# EAGLE board Son Robot Kart (EAGLE 9.6.2)
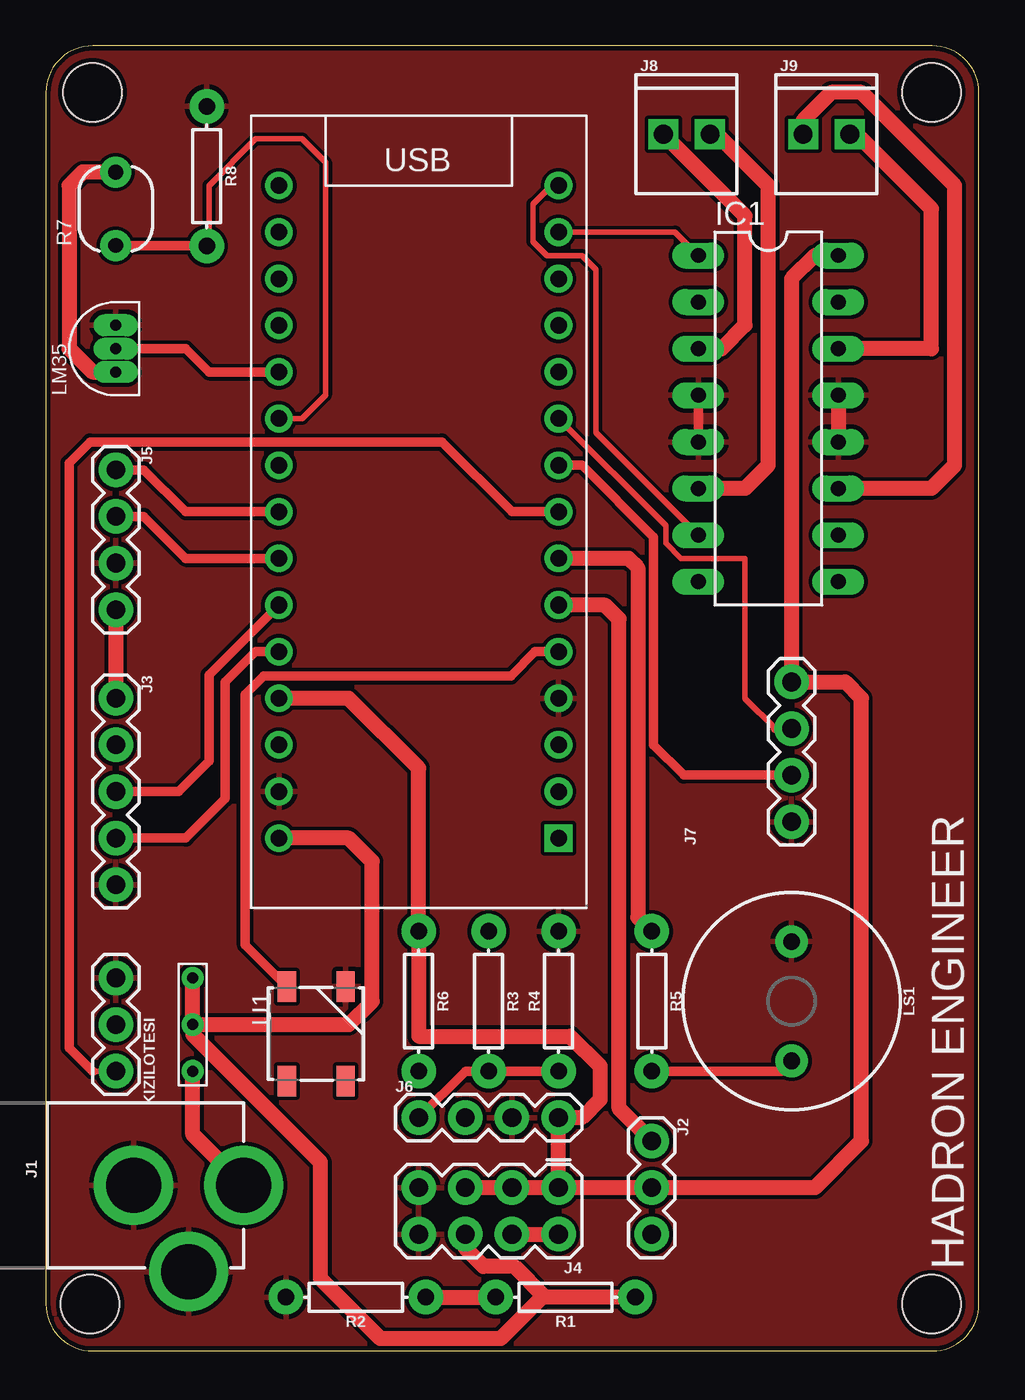
[diagram p0: board, top side]
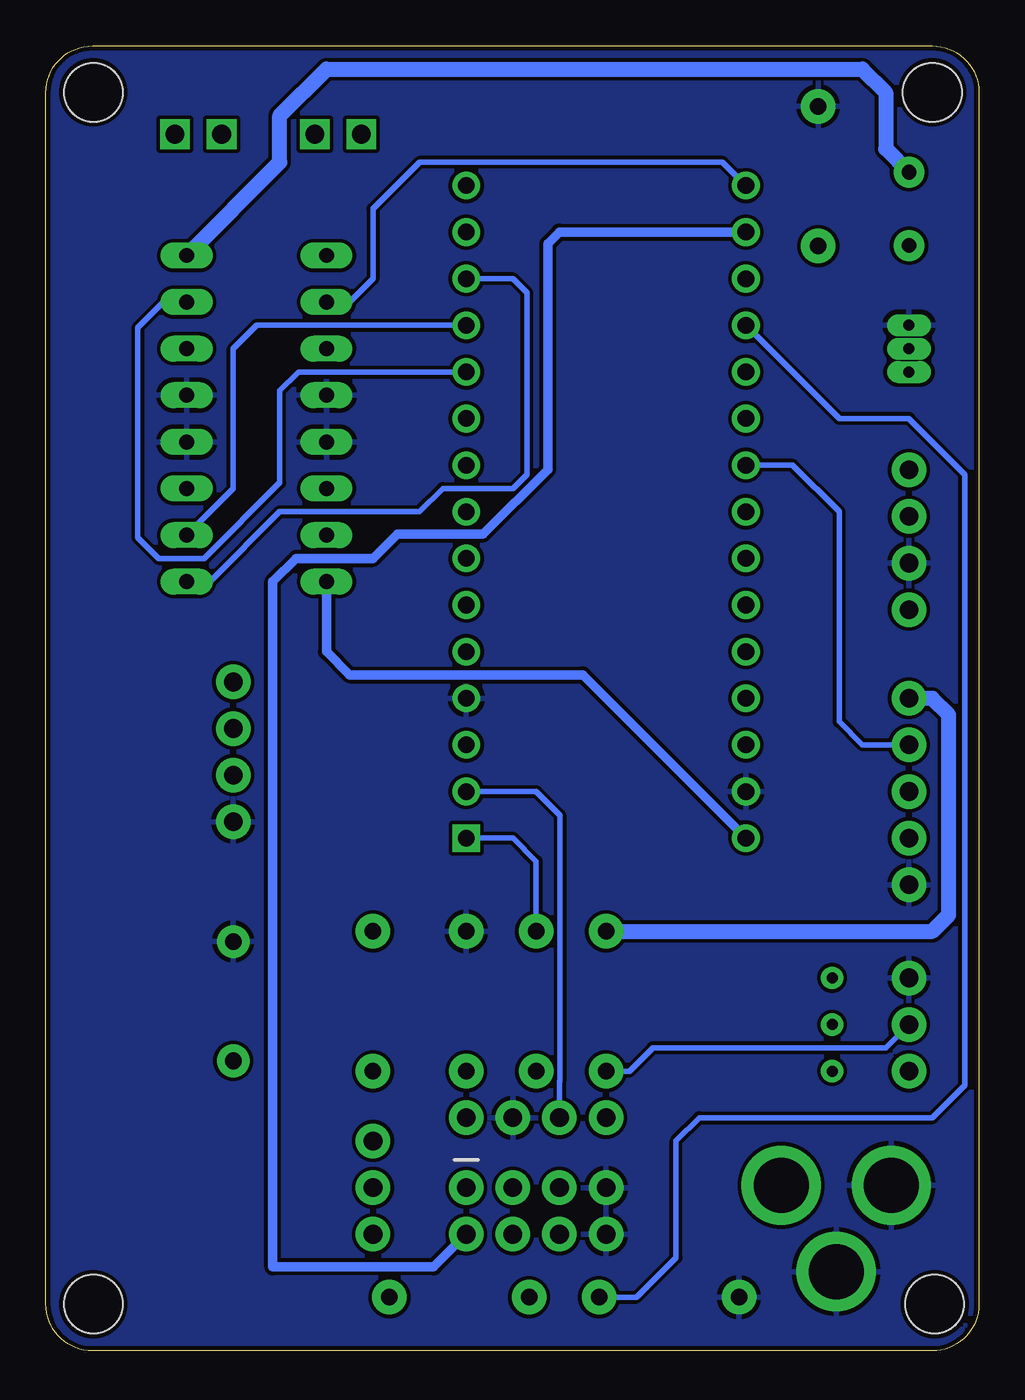
[diagram p1: board, bottom side, seen from below]

Size 50.85 x 71.11 mm. Coordinates in mm from the lower left corner, seen from the top.
Outline: 48.31,71.11 2.54,71.11 arc90 0,68.57 0,2.54 arc90 2.54,0 48.31,0 arc90 50.85,2.54 50.85,68.57 arc90 48.31,71.11
Copper layers (1*16): Top 0.035mm / dielectric 1.5mm / Bottom 0.035mm
Design rules "SparkFun": minimum track width 8mil, minimum drill 20mil, track to track 8mil, track to pad 8mil, pad to pad 8mil, via to via 8mil, smd to smd 8mil, copper to edge 10mil, drill to drill 8mil, minimum pad ring 12mil, minimum via ring 10mil, stop-mask expansion 4mil, vias tented up to drill 25mil, thermal gap 10mil
Holes 3.2 mm at 2.54,68.58 48.26,68.58 48.26,2.54 2.41,2.54

## Footprints (pad centres in the part's own frame; a part is rotated, then mirrored left to right if it is on the bottom)
ARDUINONANO = drill 0.9: 3.3V 7.62,-15.24; 5V 7.62,10.16; A0 7.62,-10.16; A1 7.62,-7.62; A2 7.62,-5.08; A3 7.62,-2.54; A4 7.62,0; A5 7.62,2.54; A6 7.62,5.08; A7 7.62,7.62; D2 -7.62,7.62; D3 -7.62,5.08; D4 -7.62,2.54; D5 -7.62,0; D6 -7.62,-2.54; D7 -7.62,-5.08; D8 -7.62,-7.62; D9 -7.62,-10.16; D10 -7.62,-12.7; D11 -7.62,-15.24; D12 -7.62,-17.78; D13 7.62,-17.78; GND -7.62,10.16; GND2 7.62,15.24; REF 7.62,-12.7; RST -7.62,12.7; RST2 7.62,12.7; RX0 -7.62,15.24; VIN 7.62,17.78 | drill 0.9 square: TX1 -7.62,17.78
DIL16 = drill 0.813 long: 1 -8.89,-3.81; 2 -6.35,-3.81; 3 -3.81,-3.81; 4 -1.27,-3.81; 5 1.27,-3.81; 6 3.81,-3.81; 7 6.35,-3.81; 8 8.89,-3.81; 9 8.89,3.81; 10 6.35,3.81; 11 3.81,3.81; 12 1.27,3.81; 13 -1.27,3.81; 14 -3.81,3.81; 15 -6.35,3.81; 16 -8.89,3.81
POWER_JACK_PTH = drill 2.997 pad 4.318: GND 0,7.7; GNDBREAK 4.7,10.7; PWR 0,13.7
1X03 = drill 1.016 pad 1.88: 1 0,0; 2 2.54,0; 3 5.08,0
1X05 = drill 1.016 pad 1.88: 1 0,0; 2 2.54,0; 3 5.08,0; 4 7.62,0; 5 10.16,0
2X4 = drill 1.016 pad 1.88: 1 -3.81,-1.27; 2 -3.81,1.27; 3 -1.27,-1.27; 4 -1.27,1.27; 5 1.27,-1.27; 6 1.27,1.27; 7 3.81,-1.27; 8 3.81,1.27
1X04 = drill 1.016 pad 1.88: 1 0,0; 2 2.54,0; 3 5.08,0; 4 7.62,0
1X02_2.54_SCREWTERM = drill 1.016 square: P1 2.54,0; P2 0,0
TO-92 = drill 0.6 long: 1 2.54,1.27; 2 3.81,1.27; 3 5.08,1.27
BUZZER-12MM = drill 0.9 pad 1.778: + 3.25,0; - -3.25,0
AXIAL-0.3 = drill 0.9 pad 1.88: P$1 -3.81,0; P$2 3.81,0
PHOTOCELL = drill 0.8 pad 1.676: 1 -2,0; 2 2,0
SWITCH = drill 0.6: P$1 -2.54,0; P$2 0,0; P$3 2.54,0
WS2812B = smd 1.651 x 1: 1 -2.577,1.6; 2 -2.577,-1.6; 3 2.577,-1.6; 4 2.577,1.6

## Placement (x,y rotation side)
ARDUINO  ARDUINONANO  [ARDUINONANO]  20.32,45.72 180 top
IC1  L293D  [DIL16]  39.37,50.8 270 top
J1  POWER_JACK  [POWER_JACK_PTH]  -2.92,9.02 270 top
J2  [1X03]  33.02,11.43 270 top
J3  [1X05]  3.81,35.56 270 top
J4  [2X4]  24.13,7.62 180 top
J5  [1X04]  3.81,48.01 270 top
J6  [1X04]  20.32,12.7 0 top
J7  [1X04]  40.64,28.83 90 top
J8  [1X02_2.54_SCREWTERM]  33.66,66.29 0 top
J9  [1X02_2.54_SCREWTERM]  41.27,66.29 0 top
KIZILOTESI  [1X03]  3.81,15.24 90 top
LM35  LM35  [TO-92]  5.08,50.8 90 top
LS1  BUZZER-PTH  [BUZZER-12MM]  40.64,19.05 270 top
R1  7k  [AXIAL-0.3]  28.32,2.92 180 top
R2  5k  [AXIAL-0.3]  16.89,2.92 180 top
R3  5k  [AXIAL-0.3]  24.13,19.05 270 top
R4  10k  [AXIAL-0.3]  27.94,19.05 90 top
R5  1K  [AXIAL-0.3]  33.02,19.05 270 top
R6  100  [AXIAL-0.3]  20.32,19.05 270 top
R7  PHOTOCELLPTH  [PHOTOCELL]  3.81,62.23 90 top
R8  10k  [AXIAL-0.3]  8.76,64.01 270 top
SW1  [SWITCH]  8,17.78 90 top
U1  WS2812B  [WS2812B]  14.73,17.27 90 top

## Library data of the parts
ARDUINO LM35 = Arduino Paketi
IC1 = st-microelectronics; MPN: L293D; OC_FARNELL: 9589619; OC_NEWARK: 56P8249
J1 = SparkFun-Connectors; PROD_ID: CONN-08197
J2-J4 J8 J9 KIZILOTESI = SparkFun-Connectors
J5-J7 = SparkFun-Connectors; PROD_ID: CONN-09696
LS1 = SparkFun-Electromechanical; PROD_ID: COMP-08253; SF_SKU: COM-07950
R1-R6 R8 = SparkFun-Resistors; PROD_ID: RES-09327
R7 = SparkFun
SW1 = SWITCH PACKET
U1 = SparkFun-LED; PROD_ID: DIO-12503

## Nets
3.3V: ARDUINO.3.3V J4.2 J4.4
5V: ARDUINO.5V IC1.16 J2.2 J3.1 J4.1 J4.3 J4.5 J5.4 J6.4 J7.4 LM35.1 R6.P$1 R7.2
BT_RX: J6.1 R3.P$2 R4.P$1
BT_TX: ARDUINO.RX0 J6.2
BUZZER: ARDUINO.D4 R5.P$1
DO: J2.3
ECHO: ARDUINO.D6 J7.2
GND: ARDUINO.GND ARDUINO.GND2 IC1.4 IC1.5 IC1.12 IC1.13 J1.GND J1.GNDBREAK J3.5 J4.7 J4.8 J5.3 J6.3 J7.1 KIZILOTESI.3 LM35.3 LS1.- R2.P$2 R4.P$2 R8.P$1 U1.3
IR_RMT: ARDUINO.D5 KIZILOTESI.1
LDR: ARDUINO.A2 R7.1 R8.P$2
LINE_C: ARDUINO.A6 J3.3
LINE_L: ARDUINO.A3 J3.2
LINE_R: ARDUINO.A7 J3.4
M_ENA: ARDUINO.D11 IC1.1
M_ENB: ARDUINO.D10 IC1.9
M_IN1: ARDUINO.D13 IC1.2
M_IN2: ARDUINO.D12 IC1.7
M_IN3: ARDUINO.D9 IC1.10
M_IN4: ARDUINO.D8 IC1.15
MOTOR1_A: IC1.3 J8.P2
MOTOR1_B: IC1.6 J8.P1
MOTOR2_A: IC1.14 J9.P1
MOTOR2_B: IC1.11 J9.P2
N$1: ARDUINO.TX1 R3.P$1
N$2: LS1.+ R5.P$2
N$3: J1.PWR SW1.P$1
N$4: KIZILOTESI.2 R6.P$2
SCL: ARDUINO.A5 J5.2
SDA: ARDUINO.A4 J5.1
SERVO: ARDUINO.D3 J2.1
TEMP: ARDUINO.A1 LM35.2
TRIGGER: ARDUINO.D7 J7.3
V_SENS: ARDUINO.A0 R1.P$2 R2.P$1
VCC: U1.1
VIN: ARDUINO.VIN IC1.8 J4.6 R1.P$1 SW1.P$2 SW1.P$3
WS2812B: ARDUINO.D2 U1.4

## Tracks (layer width: path | path; a pad name or v marks a point on that pad's centre or on a via)
3.3V
  Top 0.813: J4.4 J4.2
  Bottom 0.508: J4.2 29.72,4.57 38.48,4.57 38.48,41.91 37.21,43.18 33.02,43.18 31.69,44.51 27.02,44.51 23.5,48.03 23.5,60.33 22.86,60.96 ARDUINO.3.3V
5V
  Top 0.813: J4.1 J4.3 J4.5 | R7.2 2,64.23 1.27,63.5 1.27,54.61 2.54,53.34 LM35.1 | IC1.16 41.91,59.69 40.64,58.42 J7.4 43.56,36.45 44.45,35.56 44.45,11.43 41.91,8.89 J2.2 J4.1 | ARDUINO.5V 16.51,35.56 20.32,31.75 R6.P$1 20.32,17.14 28.57,17.14 30.2,15.52 30.2,13.69 29.21,12.7 J6.4 J4.1 | J5.4 J3.1
  Bottom 0.813: R6.P$1 2.54,22.86 1.65,23.75 1.65,34.67 2.54,35.56 J3.1 | IC1.16 38.1,64.77 38.1,67.31 35.56,69.85 6.35,69.85 5.08,68.58 5.08,65.5 R7.2
BT_RX
  Top 0.508: R4.P$1 R3.P$2 22.86,15.24 J6.1
BT_TX
  Bottom 0.305: ARDUINO.RX0 24.13,30.48 22.84,29.18 22.84,14.7 22.86,14.68 J6.2
BUZZER
  Top 0.813: R5.P$1 32.26,23.62 32.26,42.67 31.75,43.18 ARDUINO.D4
ECHO
  Top 0.508: J7.2 34.77,31.37 33.12,33.02 33.12,44.35 29.21,48.26 ARDUINO.D6
GND
  Top 0.508: IC1.5 IC1.4
  Top 0.813: IC1.13 IC1.12
  pour Top: -5.08,-2.54 55.88,-2.54 55.88,73.66 -5.08,73.66
  pour Bottom: -7.62,-5.08 58.42,-5.08 58.42,76.2 -7.62,76.2
IR_RMT
  Top 0.305: KIZILOTESI.1 2.54,15.24
  Top 0.508: 2.54,15.24 1.27,16.51 1.27,48.39 2.41,49.53 21.59,49.53 25.4,45.72 ARDUINO.D5
LDR
  Top 0.305: R8.P$2 8.89,60.33 8.89,63.5 11.43,66.04 13.97,66.04 15.24,64.77 15.24,52.07 13.97,50.8 ARDUINO.A2
  Top 0.508: R7.1 8.73,60.23 R8.P$2
LINE_C
  Top 0.508: J3.3 7.24,30.48 8.89,32.13 8.89,36.83 ARDUINO.A6
LINE_L
  Bottom 0.305: J3.2 6.35,33.02 7.62,34.29 7.62,45.72 10.16,48.26 ARDUINO.A3
LINE_R
  Top 0.508: ARDUINO.A7 11.43,38.1 9.78,36.45 9.78,30.1 7.62,27.94 J3.4
M_ENA
  Top 0.305: ARDUINO.D11 34.29,60.96 IC1.1
M_ENB
  Bottom 0.305: IC1.9 41.91,41.91 38.1,45.72 30.48,45.72 29.21,46.99 25.4,46.99 24.64,47.75 24.64,57.66 25.4,58.42 ARDUINO.D10
M_IN1
  Bottom 0.305: ARDUINO.D13 13.97,64.77 30.48,64.77 33.02,62.23 33.02,58.42 34.29,57.15 IC1.2
M_IN2
  Top 0.305: IC1.7 29.97,50.04 29.97,58.93 29.21,59.69 27.3,59.69 26.54,60.45 26.54,62.48 27.56,63.5 ARDUINO.D12
M_IN3
  Bottom 0.305: IC1.10 40.64,46.99 40.64,54.61 39.37,55.88 ARDUINO.D9
M_IN4
  Bottom 0.305: IC1.15 44.45,57.15 45.85,55.75 45.85,44.32 44.7,43.18 42.23,43.18 38.1,47.31 38.1,52.32 37.08,53.34 ARDUINO.D8
MOTOR1_A
  Top 0.813: IC1.3 36.83,54.61 38.1,55.88 38.1,61.85 J8.P2
MOTOR1_B
  Top 0.813: IC1.6 38.1,46.99 39.37,48.26 39.37,63.5 36.58,66.29 J8.P1
MOTOR2_A
  Top 0.813: IC1.14 48.26,54.61 48.26,62.23 44.2,66.29 J9.P1
MOTOR2_B
  Top 0.813: IC1.11 48.26,46.99 49.53,48.26 49.53,63.5 44.45,68.58 42.8,68.58 41.27,67.06 J9.P2
N$1
  Bottom 0.305: ARDUINO.TX1 25.4,27.94 24.13,26.67 R3.P$1
N$2
  Top 0.508: LS1.+ 40.08,15.24 R5.P$2
N$3
  Top 0.813: J1.PWR 8,11.79 SW1.P$1
N$4
  Bottom 0.305: KIZILOTESI.2 5.08,16.51 17.78,16.51 19.05,15.24 R6.P$2
SCL
  Top 0.508: J5.2 5.33,45.47 7.62,43.18 ARDUINO.A5
SDA
  Top 0.508: J5.1 5.33,48.01 7.62,45.72 ARDUINO.A4
SERVO
  Top 0.813: J2.1 31.24,13.21 31.24,39.88 30.48,40.64 ARDUINO.D3
TEMP
  Top 0.508: LM35.2 7.62,54.61 8.89,53.34 ARDUINO.A1
TRIGGER
  Top 0.305: 39.75,33.91 38.1,35.56 38.1,43.18 34.61,43.18 33.78,44.01 33.78,44.96 ARDUINO.D7
  Top 0.508: J7.3 39.75,33.91
V_SENS
  Top 0.813: R2.P$1 R1.P$2
  Bottom 0.305: R2.P$1 18.67,2.92 16.51,5.08 16.51,11.43 15.24,12.7 2.54,12.7 0.76,14.48 0.76,47.75 3.81,50.8 7.62,50.8 ARDUINO.A0
VIN
  Top 0.813: R1.P$1 27.21,2.92 27.13,3 | 27.13,3 25.53,4.6 23.85,4.6 22.86,5.59 J4.6 | 27.13,3 24.79,0.66 18.23,0.66 14.96,3.93 14.96,10.28 8,17.24 SW1.P$2 | SW1.P$2 16.51,17.78 17.78,19.05 17.78,26.67 16.51,27.94 ARDUINO.VIN | SW1.P$2 SW1.P$3
  Bottom 0.508: ARDUINO.VIN 21.59,36.83 34.29,36.83 35.56,38.1 IC1.8
WS2812B
  Top 0.508: U1.4 10.87,22.11 10.87,35.76 11.88,36.77 25.34,36.77 26.67,38.1 ARDUINO.D2

## Text on the board
tNames: HADRON ENGINEER